# EAGLE board CANSniffer v52 (EAGLE 9.7.0)
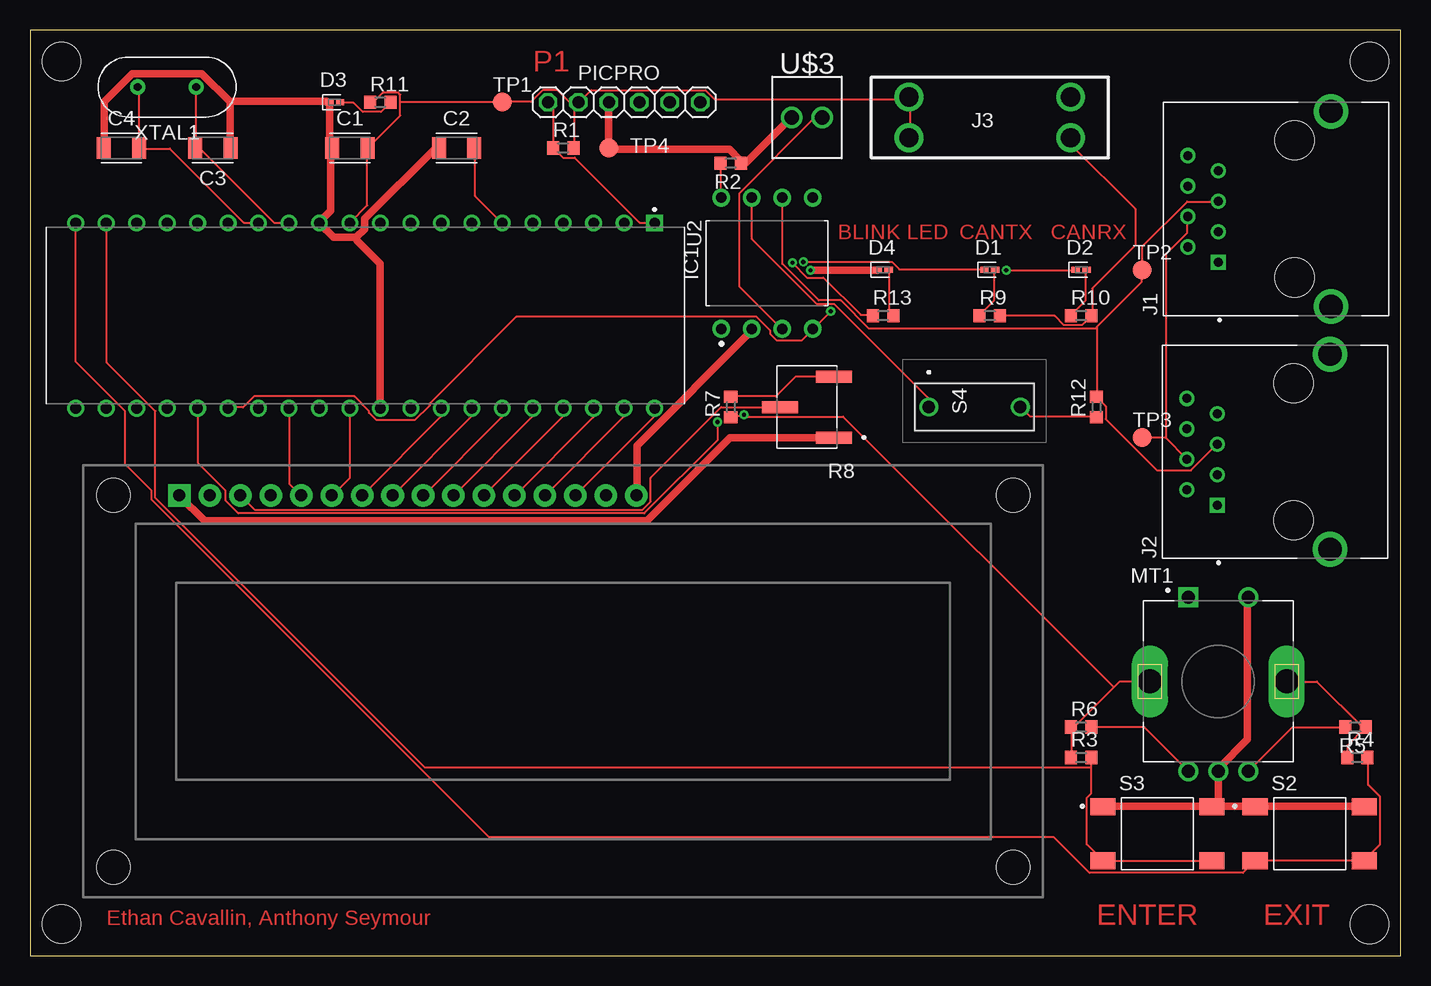
[diagram p0: board, top side]
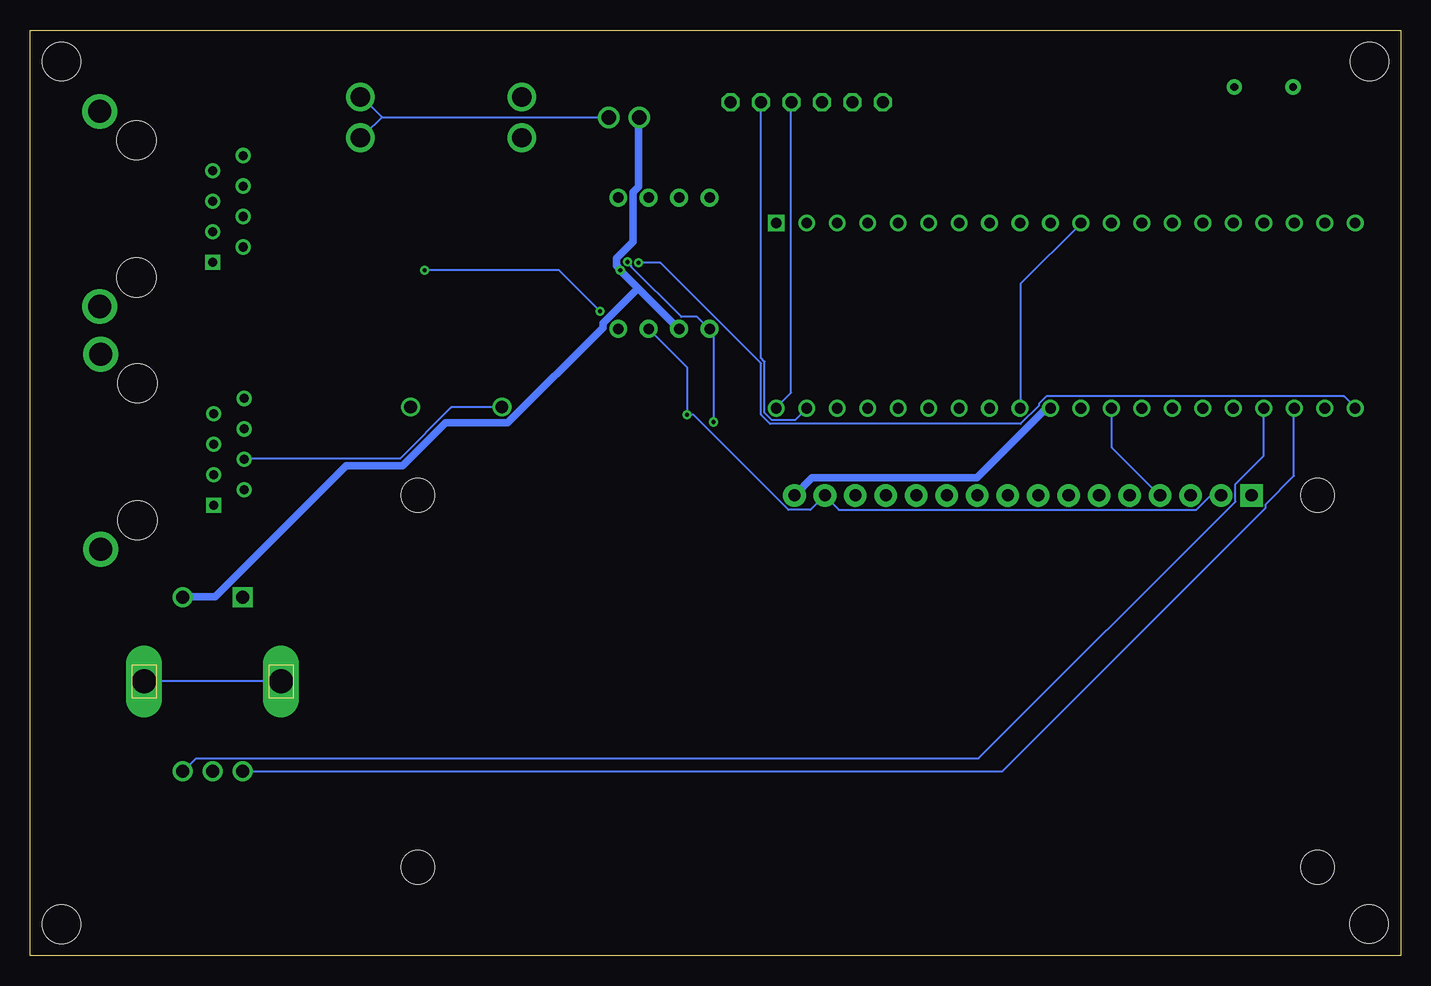
[diagram p1: board, bottom side, seen from below]

Size 114.28 x 77.14 mm. Coordinates in mm from the lower left corner, seen from the top.
Outline: 0,0 114.28,0 114.28,77.14 0,77.14 0,0
Copper layers (1*16): Top 0.035mm / dielectric 1.5mm / Bottom 0.035mm
Design rules "default": minimum track width 6mil, minimum drill 0.35mm, track to track 6mil, track to pad 6mil, pad to pad 6mil, via to via 6mil, smd to smd 6mil, copper to edge 40mil, drill to drill 6mil, minimum pad ring 10mil, minimum via ring 8mil, stop-mask expansion 4mil, vias tented up to drill 0mil, thermal gap 10mil
Net classes: 2 12V: width 0.635 mm; 3 GND: width 0.635 mm
Holes 3.2 mm at 2.64,2.64 111.66,2.62 111.66,74.52 2.62,74.52

## Footprints (pad centres in the part's own frame; a part is rotated, then mirrored left to right if it is on the bottom)
CAPC3216X135 = smd 1.165 x 1.815: 1 -1.475,0; 2 1.475,0
LEDC1005X25N_FLAT-B = smd 0.7 x 0.5: A 0.45,0; C -0.45,0
DIP1092W55P254L949H533Q8B = drill 0.876 pad 1.476: 1 -5.461,3.81; 2 -5.461,1.27; 3 -5.461,-1.27; 4 -5.461,-3.81; 5 5.461,-3.81; 6 5.461,-1.27; 7 5.461,1.27; 8 5.461,3.81
TE_RJ45-8Z4 = drill 0.76 square: 1 -4.445,6.35 | drill 0.76: 2 -3.175,8.89; 3 -1.905,6.35; 4 -0.635,8.89; 5 0.635,6.35; 6 1.905,8.89; 7 3.175,6.35; 8 4.445,8.89 | drill 1.93: 9 -8.125,-3.05; 10 8.125,-3.05 | hole 3.25: 5.715,0; -5.715,0
3557-2 = drill 1.6 pad 2.4: 1 -6.735,1.7; 2 6.735,1.7; 3 -6.735,-1.7; 4 6.735,-1.7
XDCR_PEC11R-4215F-S0024 = drill 1.1 square: 1 -2.5,7 | drill 1.1: 2 2.5,7; A -2.5,-7.5; B 2.5,-7.5; COM 0,-7.5 | drill 2 long: S1 -5.7,0; S2 5.7,0
1X06 = drill 1.016 octagon: 1 -6.35,0; 2 -3.81,0; 3 -1.27,0; 4 1.27,0; 5 3.81,0; 6 6.35,0
R0603 = smd 1 x 1.1: 1 -0.85,0; 2 0.85,0
TRIM_TS63Y253KT20 = smd 3 x 1: 1 -2.25,2.54; 2 2.25,0; 3 -2.25,-2.54
SW_1571563-8 = smd 2.1 x 1.4: 1 -4.55,2.25; 2 4.55,2.25; 3 -4.55,-2.25; 4 4.55,-2.25
DS01254S01BE = drill 1.05 pad 1.575: 1 0,0; 2 0,7.62
TP16R = smd 1.6 x 1.6: TP 0,0
DIP1543W47P254L5321H635Q40 = drill 0.89 pad 1.24 square: 1 -7.715,24.13 | drill 0.89 pad 1.24: 2 -7.715,21.59; 3 -7.715,19.05; 4 -7.715,16.51; 5 -7.715,13.97; 6 -7.715,11.43; 7 -7.715,8.89; 8 -7.715,6.35; 9 -7.715,3.81; 10 -7.715,1.27; 11 -7.715,-1.27; 12 -7.715,-3.81; 13 -7.715,-6.35; 14 -7.715,-8.89; 15 -7.715,-11.43; 16 -7.715,-13.97; 17 -7.715,-16.51; 18 -7.715,-19.05; 19 -7.715,-21.59; 20 -7.715,-24.13; 21 7.715,-24.13; 22 7.715,-21.59; 23 7.715,-19.05; 24 7.715,-16.51; 25 7.715,-13.97; 26 7.715,-11.43; 27 7.715,-8.89; 28 7.715,-6.35; 29 7.715,-3.81; 30 7.715,-1.27; 31 7.715,1.27; 32 7.715,3.81; 33 7.715,6.35; 34 7.715,8.89; 35 7.715,11.43; 36 7.715,13.97; 37 7.715,16.51; 38 7.715,19.05; 39 7.715,21.59; 40 7.715,24.13
LCD-16X2_NOSILK = drill 1.016 pad 1.88 square: 1 -32,15.5 | drill 1.016 pad 1.88: 2 -29.46,15.5; 3 -26.92,15.5; 4 -24.38,15.5; 5 -21.84,15.5; 6 -19.3,15.5; 7 -16.76,15.5; 8 -14.22,15.5; 9 -11.68,15.5; 10 -9.14,15.5; 11 -6.6,15.5; 12 -4.06,15.5; 13 -1.52,15.5; 14 1.02,15.5; 15 3.56,15.5; 16 6.1,15.5 | hole 2.8: -37.5,15.5; -37.5,-15.5; 37.5,15.5; 37.5,-15.5
TERMBLK_254-2N = drill 1.2: 1 0,0; 2 2.54,0
XTALRR488W45L1150T500H350B = drill 0.657 pad 1.257: 1 -2.44,0; 2 2.44,0

## Placement (x,y rotation side)
C1  0.1uF  [CAPC3216X135]  26.67,67.31 0 top
C2  0.1uF  [CAPC3216X135]  35.56,67.31 0 top
C3  22pF  [CAPC3216X135]  15.24,67.31 180 top
C4  22pF  [CAPC3216X135]  7.62,67.31 0 top
D1  LED_BLUE  [LEDC1005X25N_FLAT-B]  80.01,57.15 0 top
D2  LED_BLUE  [LEDC1005X25N_FLAT-B]  87.63,57.15 0 top
D3  LED_BLUE  [LEDC1005X25N_FLAT-B]  25.4,71.12 0 top
D4  LED_BLUE  [LEDC1005X25N_FLAT-B]  71.12,57.15 0 top
IC1  MCP2551  [DIP1092W55P254L949H533Q8B]  61.44,57.7 90 top
J1  RJ45-8Z4  [TE_RJ45-8Z4]  105.41,62.23 90 top
J2  RJ45-8Z4  [TE_RJ45-8Z4]  105.33,41.99 90 top
J3  3557-2  [3557-2]  80.01,69.85 0 top
MT1  PEC11R-4215F-S0024  [XDCR_PEC11R-4215F-S0024]  99.06,22.86 0 top
PICPRO  [1X06]  49.53,71.12 0 top
R1  56K  [R0603]  44.45,67.31 0 top
R2  10K  [R0603]  58.42,66.04 180 top
R3  110  [R0603]  87.63,16.51 0 top
R4  110  [R0603]  110.64,16.51 0 top
R5  110  [R0603]  110.49,19.05 180 top
R6  110  [R0603]  87.63,19.05 0 top
R7  330  [R0603]  58.42,45.72 90 top
R8  TS63Y253KT20  [TRIM_TS63Y253KT20]  64.77,45.72 180 top
R9  470  [R0603]  80.01,53.34 0 top
R10  470  [R0603]  87.63,53.34 0 top
R11  470  [R0603]  29.21,71.12 0 top
R12  120  [R0603]  88.9,45.72 90 top
R13  470  [R0603]  71.12,53.34 0 top
S2  1571563-8  [SW_1571563-8]  106.68,10.16 0 top
S3  1571563-8  [SW_1571563-8]  93.98,10.16 0 top
S4  DS01-254-S-01BE  [DS01254S01BE]  74.93,45.72 270 top
TP1  TPTP16R  [TP16R]  39.37,71.12 0 top
TP2  TPTP16R  [TP16R]  92.71,57.15 0 top
TP3  TPTP16R  [TP16R]  92.71,43.18 0 top
TP4  TPTP16R  [TP16R]  48.26,67.31 0 top
U2  DIP1543W47P254L5321H635Q40  [DIP1543W47P254L5321H635Q40]  27.94,53.34 270 top
U3  LCD-16X2NOSILK  [LCD-16X2_NOSILK]  44.45,22.86 0 top
U$3  2828XX-2282834-2  [TERMBLK_254-2N]  66.04,69.85 180 top
XTAL1  20 MHz  [XTALRR488W45L1150T500H350B]  11.43,72.39 180 top

## Library data of the parts
C1-C4 = Capacitor; CATEGORY: Capacitor
D1-D4 = LED; CATEGORY: LED; COLOR: BLUE; DESCRIPTION: CHIP LED FLAT; SUB-CATEGORY: CHIP; TYPE: FLAT_TOP
IC1 = IC_Interface; CATEGORY: RF_Wireless; MANUFACTURER: Microchip; MPN: MCP2551-I/SN; OPERATING_TEMP: -40 to +85 °C; PART_STATUS: Active; ROHS_COMPLIANT: RoHS3 Compliant; SUB-CATEGORY: Transceiver
J1 J2 = RJ45-8Z4; AVAILABILITY: Good; DESCRIPTION: RJ Jack / Signal Line EMI/RFI Filters 8 TRM NO FLTR LOWPRO BRD GRND&CBL; GRND; MF: TE; MP: RJ45-8Z4; PACKAGE: None; PRICE: 4.35 USD; STANDARD: Manufacturer Recommendation
J3 = 3557-2; DESCRIPTION: THM 2 in 1 Auto Blade Holder P/N 3557-2; HEIGHT: mm; MANUFACTURER_NAME: Keystone Electronics; MANUFACTURER_PART_NUMBER: 3557-2; MOUSER_PART_NUMBER: 534-3557-2; MOUSER_PRICE-STOCK: https://www.mouser.co.uk/ProductDetail/Keystone-Electronics/3557-2?qs=cxy41lVAGV%2FfbyASjpXK1g%3D%3D
MT1 = PEC11R-4215F-S0024 (1); MANUFACTURER: J.W.Miller/Bourns; MAXIMUM_PACKAGE_HEIGHT: 21.5 mm; PARTREV: Rev. 09/19; STANDARD: Manufacturer Recommendations
PICPRO R1-R7 R9-R13 = adafruit
R8 = TS63Y253KT20; MANUFACTURER: Vishay; MAXIMUM_PACKAGE_HEIGHT: 8 mm; PARTREV: 17-Oct-2018; SNAPEDA_PN: TS63Y253KT20; STANDARD: Manufacturer Recommendations
S2 S3 = 1571563-8; COMMENT: 1571563-8; EU_ROHS_COMPLIANCE: Compliant
S4 = Switch; ARROW_PART_NUMBER: DS01-254-S-01BE; ARROW_PRICE-STOCK: https://www.arrow.com/en/products/ds01-254-s-01be/cui-devices?region=nac; DESCRIPTION: DIP Switches / SIP Switches DIP Switch, SPST, 2.54 pitch, raised actuator, flat bottom, Short pin, 1 position, Blue; HEIGHT: 7mm; MANUFACTURER_NAME: CUI Inc.; MANUFACTURER_PART_NUMBER: DS01-254-S-01BE; MOUSER_PART_NUMBER: 490-DS01-254-S-01BE; MOUSER_PRICE-STOCK: https://www.mouser.co.uk/ProductDetail/CUI-Devices/DS01-254-S-01BE?qs=wnTfsH77Xs7pnks1JfJqEQ%3D%3D
TP1-TP4 = testpad
U2 = DIP1543W47P254L5321H635Q40; A_MAX: 6.35; A_MIN: 6.35; A_NOM: 6.35; B_MAX: 0.584; B_MIN: 0.356; B_NOM: 0.47; D_MAX: 53.213; D_MIN: 50.292; D_NOM: 51.752; E1_MAX: 14.732; E1_MIN: 12.319; E1_NOM: 13.526; ENOM: 2.54; E_NOM: 15.431; MANUFACTURER: Microchip; PIN_COUNT: 40.0; STANDARD: IPC 7351B
U3 = newLCD; AVAILABILITY: In Stock; DESCRIPTION: Display Development Tools 16x2 Black on Green Char LCD w Backlight; MF: Gravitech; MP: LCD-16X2; PACKAGE: None; PRICE: None; PURCHASE-URL: https://pricing.snapeda.com/search/part/LCD-16X2/?ref=eda
U$3 = Connector
XTAL1 = Frequency-Source; CATEGORY: Frequency-Source; SUB-CATEGORY: Crystal-2Pin

## Nets
+5V: IC1.3 J3.2 J3.4 MT1.S1 MT1.S2 R3.1 R4.1 R5.1 R6.1 R7.1 R9.2 R10.2 U3.2 U3.15 U$3.1
GND [12V]: C1.1 C2.1 C3.1 C4.1 D3.C D4.C IC1.2 MT1.2 MT1.COM PICPRO.3 R2.1 S2.1 S2.2 S3.1 S3.2 TP4.TP U2.12 U2.31 U3.16 U$3.2
N$1: PICPRO.1 R1.1 U2.1
N$2: U2.33 U3.7
N$3: IC1.8 R2.2
N$4: D1.C IC1.1 U2.25
N$5: PICPRO.4 U2.40 U3.14
N$6: PICPRO.5 U2.39 U3.13
N$7: U2.34 U3.8
N$8: U2.35 U3.9
N$9: D2.C IC1.4 U2.26
N$10: C3.2 U2.13 XTAL1.1
N$11: C4.2 U2.14 XTAL1.2
N$12: IC1.6 J1.5 J2.5 R12.2 TP2.TP
N$13: IC1.7 J1.4 J2.4 S4.1 TP3.TP
N$14: U2.36 U3.10
N$15: U2.37 U3.11
N$16: U2.38 U3.12
N$17: U2.28 U3.5
N$18: U2.29 U3.4
N$19: U2.30 U3.6
N$20: D2.A R10.1
N$21: R7.2 R8.3
N$22: R3.2 S3.3 S3.4 U2.19
N$23: R4.2 S2.3 S2.4 U2.20
N$24: C2.2 U2.6
N$25: MT1.A R6.2 U2.23
N$26: MT1.B R5.2 U2.24
N$27: R8.2 U3.3
N$28: D1.A R9.1
N$29: R12.1 S4.2
N$30: C1.2 J3.1 J3.3 PICPRO.2 R1.2 R11.1 TP1.TP U2.11 U2.32
N$31 [12V]: R8.1 U3.1
N$32: D3.A R11.2
N$33: D4.A R13.2
N$34: R13.1 U2.21

## Tracks (layer width: path | path; a pad name or v marks a point on that pad's centre or on a via)
+5V  (via drill 0.35)
  Top 0.152: R9.2 80.92,53.32 85.42,53.32 86.18,52.55 87.71,52.55 88.47,53.32 R10.2 88.54,53.39 88.54,55.6 92.13,59.18 92.13,62.23 86.7,67.65 | 86.41,67.94 86.7,67.65 | R3.1 86.79,16.51 86.79,19.02 R6.1 86.87,19.02 87.02,19.02 90.35,22.36 | 90.35,22.36 90.83,22.84 93.34,22.84 MT1.S1 | R4.1 109.8,16.51 109.8,17.5 111.33,19.02 R5.1 111.18,18.95 107.29,22.84 104.78,22.84 MT1.S2 | v59.51,45.09 59.36,44.93 58.45,44.93 R7.1 | U$3.1 65.46,69.85 59.13,63.53 59.13,55.75 62.64,52.25 IC1.3 | J3.4 86.68,68.1 86.68,67.63 86.7,67.65 | v59.51,45.09 59.61,44.99 | 90.35,22.36 67.79,44.93 59.37,44.93 v59.51,45.09
  Bottom 0.152: U$3.1 84.89,69.85 84.92,69.89 | 84.92,69.89 86.33,71.3 86.36,71.28 86.52,71.44 86.68,71.44 J3.2 | 86.33,68.26 86.33,68.48 84.92,69.89 | 86.33,68.26 86.33,67.94 | MT1.S1 93.42,22.91 104.7,22.91 MT1.S2 | IC1.3 62.64,52.17 59.51,49.05 v59.51,45.09 58.98,45.09 51.05,37.16 49.23,37.16 48.08,38.3 U3.15 48.01,38.3 46.86,37.16 17.07,37.16 15.93,38.3 15.01,38.3 U3.2 | 86.33,68.26 86.68,68.26 J3.4
GND  (via drill 0.35)
  Top 0.635: 16.69,71.14 14.33,73.51 8.53,73.51 6.17,71.14 6.17,67.33 C4.1 | 16.69,71.14 16.69,67.33 C3.1 | 27.2,59.87 27.89,60.55 27.89,61.39 33.76,67.26 34.06,67.26 C2.1 | 27.2,59.87 25.3,59.87 24.16,61.01 U2.12 24.31,61.32 25.07,62.08 25.07,67.03 C1.1 25.15,67.33 24.99,67.49 24.99,71.07 D3.C 24.69,71.22 16.99,71.22 16.69,71.14 | U2.31 29.18,45.7 29.18,57.66 27.28,59.56 27.2,59.87 | S3.1 89.46,12.47 98.53,12.47 S3.2 | S3.2 98.83,12.47 102.11,12.47 S2.1 102.41,12.47 111.18,12.47 S2.2 | S3.2 99.06,12.78 MT1.COM 99.14,15.67 101.5,18.03 101.5,29.84 MT1.2 | PICPRO.3 48.23,71.07 48.23,67.33 TP4.TP 48.54,67.18 58.29,67.18 59.13,66.34 R2.1 59.66,66.04 63.48,69.85 U$3.2 | v65.08,57.12 70.64,57.12 D4.C | U3.16 50.6,38.38 50.6,42.49 60.12,52.02 60.12,52.17 IC1.2
  Bottom 0.635: 63.59,55.64 60.2,52.25 IC1.2 | 63.59,55.64 v65.08,57.12 65.23,57.35 65.38,57.51 65.38,58.12 64.01,59.49 64.01,63.6 63.55,64.06 63.55,69.85 U$3.2 | 63.59,55.64 66.52,52.71 66.52,52.32 74.45,44.4 79.63,44.4 83.21,40.82 87.94,40.82 98.83,29.92 101.5,29.92 MT1.2 | U2.31 29.26,45.62 29.57,45.62 35.36,39.83 49.07,39.83 50.52,38.38 U3.16
N$1
  Top 0.152: PICPRO.1 43.2,71.07 43.59,70.69 43.59,67.33 R1.1 43.66,67.26 44.42,66.5 45.41,66.5 50.83,61.09 52.05,61.09 U2.1
N$2
  Top 0.152: U2.33 34.29,44.93 27.74,38.38 U3.7
N$3
  Top 0.152: R2.2 57.61,66.04 57.61,63.22 IC1.8
N$4  (via drill 0.35)
  Top 0.152: v64.47,57.81 71.86,57.81 72.47,57.2 79.55,57.2 D1.C | v57.3,44.48 57.3,42.95 51.21,36.86 17.37,36.86 16.31,37.92 16.31,38.76 14.02,41.05 14.02,45.62 U2.25
  Bottom 0.152: v64.47,57.81 64.16,57.51 64.16,57.43 59.97,53.24 58.67,53.24 57.68,52.25 IC1.1 57.61,52.17 57.3,51.87 v57.3,44.48
N$5
  Top 0.152: U2.40 52.05,45.62 52.05,44.93 45.49,38.38 U3.14
  Bottom 0.152: PICPRO.4 50.83,71.07 50.83,46.91 52.05,45.7 U2.40
N$6
  Top 0.152: U2.39 49.53,44.93 42.98,38.38 U3.13
  Bottom 0.152: PICPRO.5 53.34,49.81 53.03,49.51 53.03,45.24 52.43,44.63 50.52,44.63 U2.39
N$7
  Top 0.152: U2.34 36.8,45.62 36.8,44.93 30.25,38.38 U3.8
N$8
  Top 0.152: U2.35 39.32,45.62 39.32,44.86 32.84,38.38 U3.9
N$9  (via drill 0.35)
  Top 0.152: v81.38,57.12 87.17,57.12 D2.C | v66.75,53.7 65.3,52.25 IC1.4 65.23,52.17 64.31,51.26 62.26,51.26 61.72,51.79 61.72,52.1 60.58,53.24 40.54,53.24 33.3,46 33.3,45.85 32.08,44.63 28.88,44.63 28.27,45.24 28.27,45.39 27.05,46.61 18.67,46.61 17.75,45.7 16.54,45.7 U2.26
  Bottom 0.152: v81.38,57.12 70.18,57.12 v66.75,53.7
N$10
  Top 0.152: XTAL1.1 13.87,72.36 13.79,72.29 13.79,67.33 C3.2 13.87,67.33 14.1,67.33 20.34,61.09 21.57,61.09 U2.13
N$11
  Top 0.152: XTAL1.2 8.99,72.36 9.07,72.29 9.07,67.33 C4.2 9.14,67.26 11.66,67.26 17.83,61.09 19.05,61.09 U2.14
N$12
  Top 0.152: 88.92,52.25 88.92,52.4 92.66,56.13 92.66,57.12 TP2.TP 92.73,57.2 92.73,59.11 96.47,62.84 99.06,62.84 J1.5 | 88.92,52.25 88.92,46.61 R12.2 88.92,46.53 89.69,45.77 89.69,44.7 93.95,40.44 96.77,40.44 98.91,42.57 J2.5 | 88.92,52.25 69.95,52.25 67.59,54.61 65.76,54.61 62.71,57.66 62.71,63.14 IC1.6
N$13
  Top 0.152: TP3.TP 94.64,43.18 94.68,43.14 | 94.68,43.14 96.39,41.43 J2.4 | J1.4 96.47,61.54 96.47,60.25 94.72,58.5 94.72,43.18 94.68,43.14 | IC1.7 60.2,63.14 60.2,59.72 65.61,54.3 67.06,54.3 74.91,46.46 74.91,45.77 S4.1
  Bottom 0.152: J2.4 96.39,41.43 83.44,41.43 79.17,45.7 74.98,45.7 S4.1
N$14
  Top 0.152: U2.36 41.91,44.93 35.36,38.38 U3.10
N$15
  Top 0.152: U2.37 44.42,45.62 44.42,44.93 37.87,38.38 U3.11
N$16
  Top 0.152: U2.38 46.94,45.62 46.94,44.86 40.46,38.38 U3.12
N$17
  Top 0.152: U2.28 21.64,45.62 21.64,39.29 22.55,38.38 U3.5
N$18
  Bottom 0.152: U2.29 24.08,45.62 24.08,42.34 20.12,38.38 U3.4
N$19
  Top 0.152: U2.30 26.67,39.83 25.22,38.38 U3.6
N$20
  Top 0.152: D2.A 88.01,57.12 88.01,54.61 86.79,53.39 R10.1
N$21
  Top 0.152: R7.2 58.45,46.61 62.18,46.61 63.78,48.21 63.82,48.26 R8.3
N$22
  Top 0.152: 88.47,15.67 88.47,13.54 88.09,13.16 88.09,9.27 89.38,7.98 S3.3 89.46,7.9 98.53,7.9 S3.4 | 88.47,15.67 88.47,16.51 R3.2 | 88.47,15.67 32.92,15.67 10.44,38.15 10.44,45.39 6.4,49.43 6.4,61.01 U2.19
N$23
  Top 0.152: R4.2 111.56,16.51 111.56,14.22 112.55,13.23 112.55,9.27 111.25,7.98 S2.4 111.18,7.9 102.18,7.9 S2.3 102.11,7.9 101.12,6.91 88.32,6.91 85.34,9.88 38.25,9.88 10.13,38 10.13,38.76 7.92,40.97 7.92,45.39 3.81,49.51 U2.20
N$24
  Top 0.152: C2.2 37.11,67.26 37.11,63.3 39.32,61.09 U2.6
N$25
  Top 0.152: R6.2 88.54,19.02 92.89,19.02 96.55,15.37 MT1.A
  Bottom 0.152: U2.23 8.91,45.62 8.91,39.98 11.28,37.62 11.28,37.31 33.22,15.37 96.55,15.37 MT1.A
N$26
  Top 0.152: R5.2 109.58,19.02 105.23,19.02 101.58,15.37 MT1.B
  Bottom 0.152: U2.24 11.43,41.66 13.79,39.29 13.79,37.85 35.2,16.43 100.43,16.43 101.5,15.37 MT1.B
N$27
  Top 0.152: U3.3 17.6,38.3 18.75,37.16 51.05,37.16 51.74,37.85 51.74,39.83 57.61,45.7 57.63,45.72 R8.2
N$28
  Top 0.152: D1.A 80.39,57.12 80.39,54.61 79.17,53.39 R9.1
N$29
  Top 0.152: R12.1 88.85,44.93 83.36,44.93 82.6,45.7 S4.2
N$30
  Top 0.152: R1.2 45.34,67.33 45.34,70.69 45.72,71.07 PICPRO.2 | PICPRO.2 45.34,70.76 43.97,72.14 42.75,72.14 41.76,71.14 39.4,71.14 TP1.TP 39.32,71.14 30.86,71.14 | 30.86,71.14 30.86,70 28.19,67.33 C1.2 28.12,67.26 28.12,62.54 26.67,61.09 U2.11 | 30.86,71.14 30.86,71.75 30.71,71.91 29.41,71.91 28.65,71.14 28.42,71.14 R11.1 | PICPRO.2 45.8,71.14 46.79,72.14 56.31,72.14 57.07,71.37 72.85,71.37 72.87,71.44 73.18,71.44 J3.1 73.34,71.44 73.34,68.26 J3.3
  Bottom 0.152: U2.32 31.7,45.7 31.7,55.98 26.67,61.01 U2.11
N$31
  Top 0.635: U3.1 12.5,38.3 14.55,36.25 51.44,36.25 58.37,43.18 R8.1
N$32
  Top 0.152: D3.A 25.91,71.07 26.98,71.07 27.74,70.31 29.26,70.31 30.02,71.07 R11.2
N$33
  Top 0.152: D4.A 71.63,57.12 71.63,53.7 71.93,53.39 R13.2
N$34  (via drill 0.35)
  Top 0.152: v63.55,57.73 64.77,56.52 66.14,56.52 69.27,53.39 70.26,53.39 R13.1
  Bottom 0.152: v63.55,57.73 61.72,57.73 53.34,49.35 53.34,45.09 52.58,44.32 31.7,44.32 30.18,45.85 30.18,46 29.57,46.61 4.72,46.61 3.81,45.7 U2.21

## Text on the board
Top: P1 | BLINK LED | CANTX | CANRX | Ethan Cavallin, Anthony Seymour | ENTER | EXIT